# Altium PCB InfinityX PCB_1.PcbDoc
Units mm, origin at the board's own origin, x right, y up, seen from the top; angles counter-clockwise.
Board outline 76.22 x 46.5 mm, 6 copper layers (Top Layer, Layer 3, Layer 1, Layer 2, Layer 4, Bottom Layer), stack 1.019 mm thick; 25 components, 42 nets, 165 pads, 62 vias.
Unrouted connection lines stored in the file: 28.
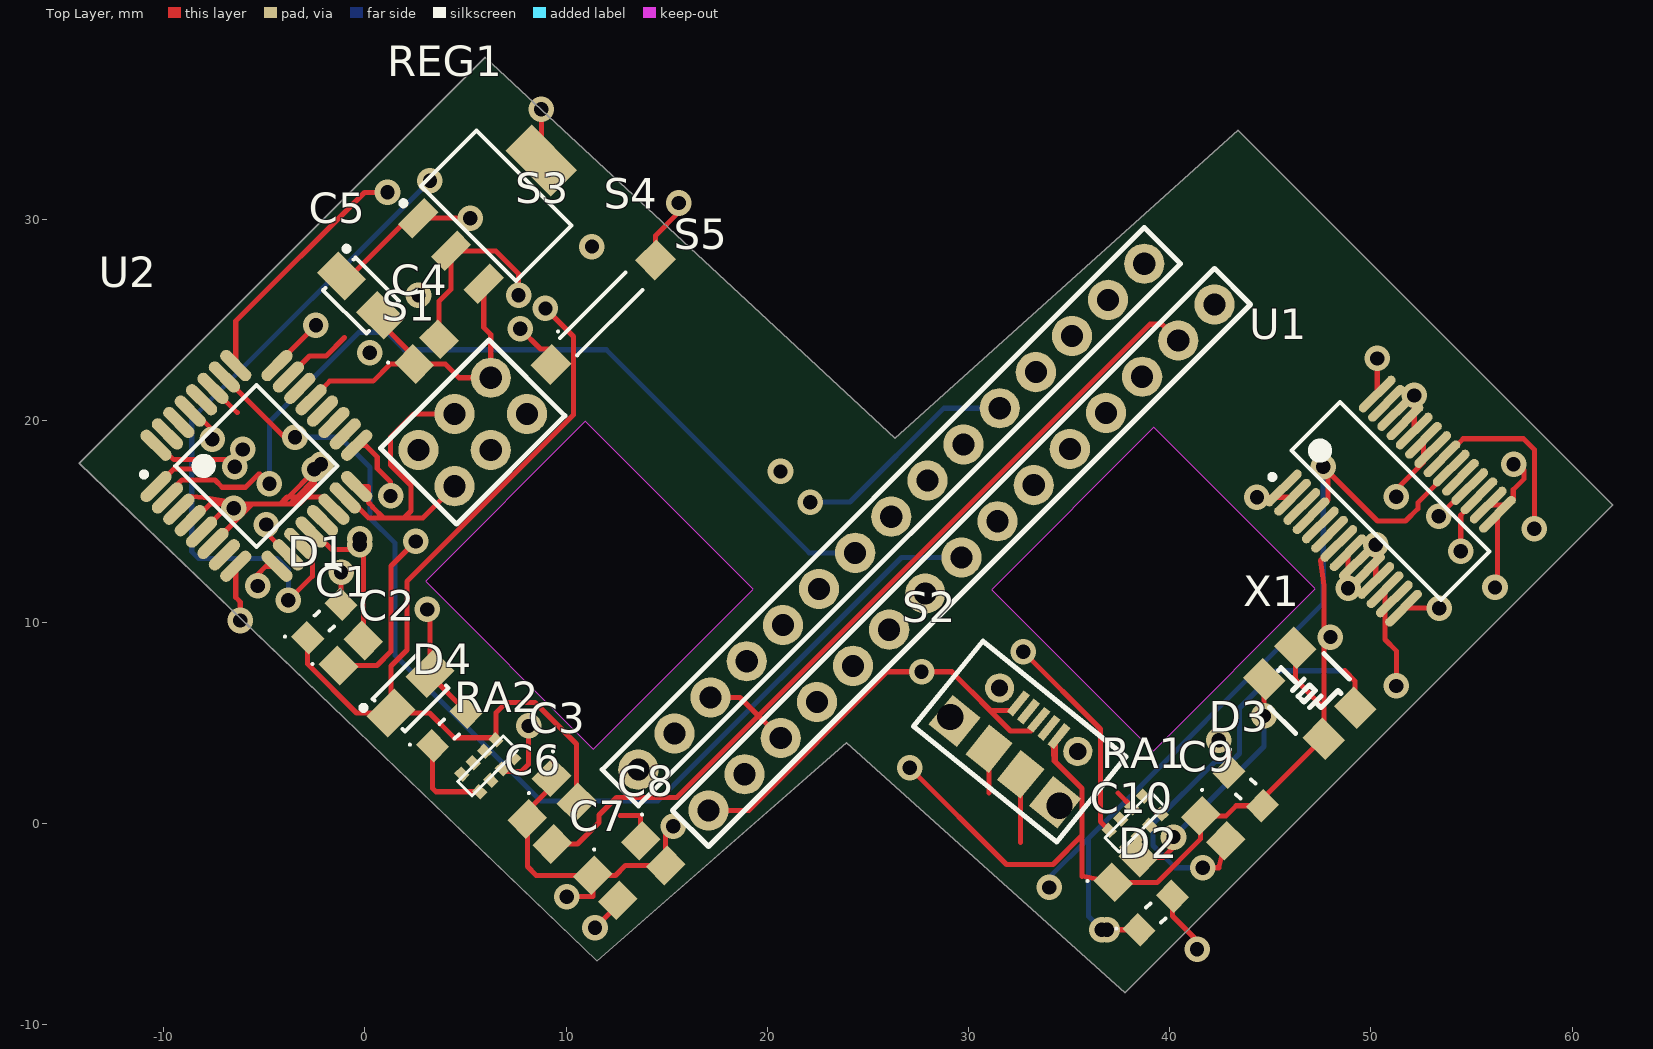
[diagram p0: Top Layer view]
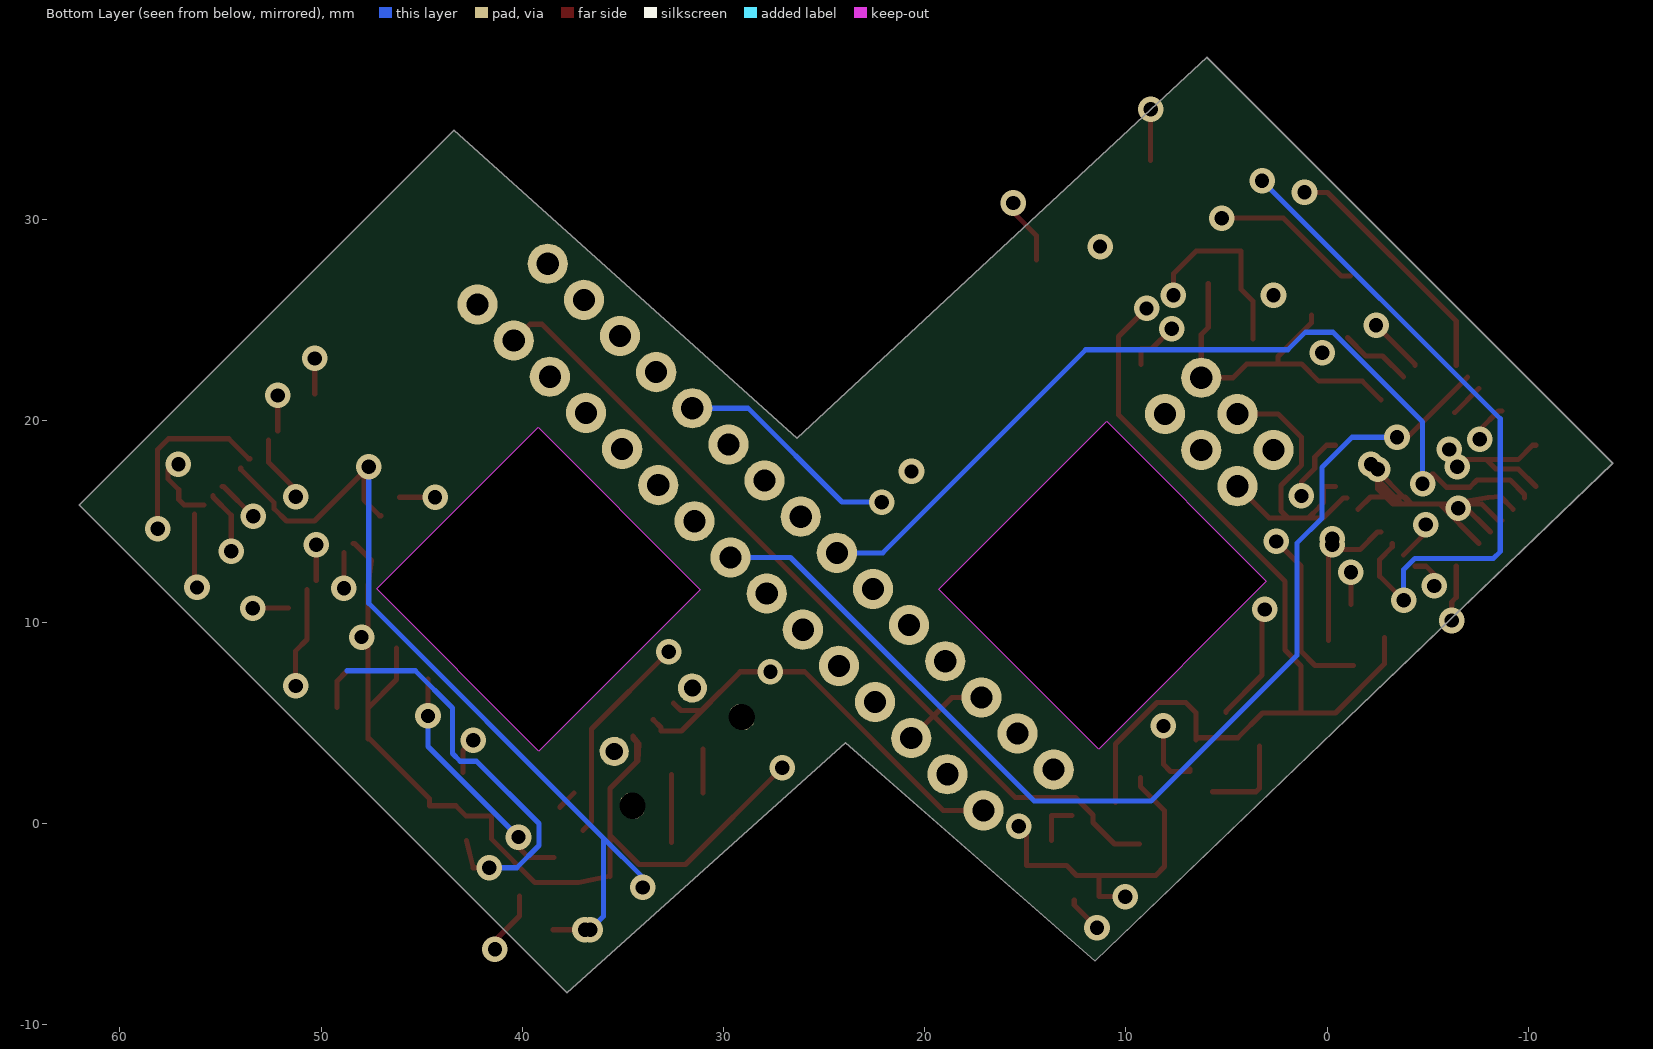
[diagram p1: Bottom Layer view, seen from below]
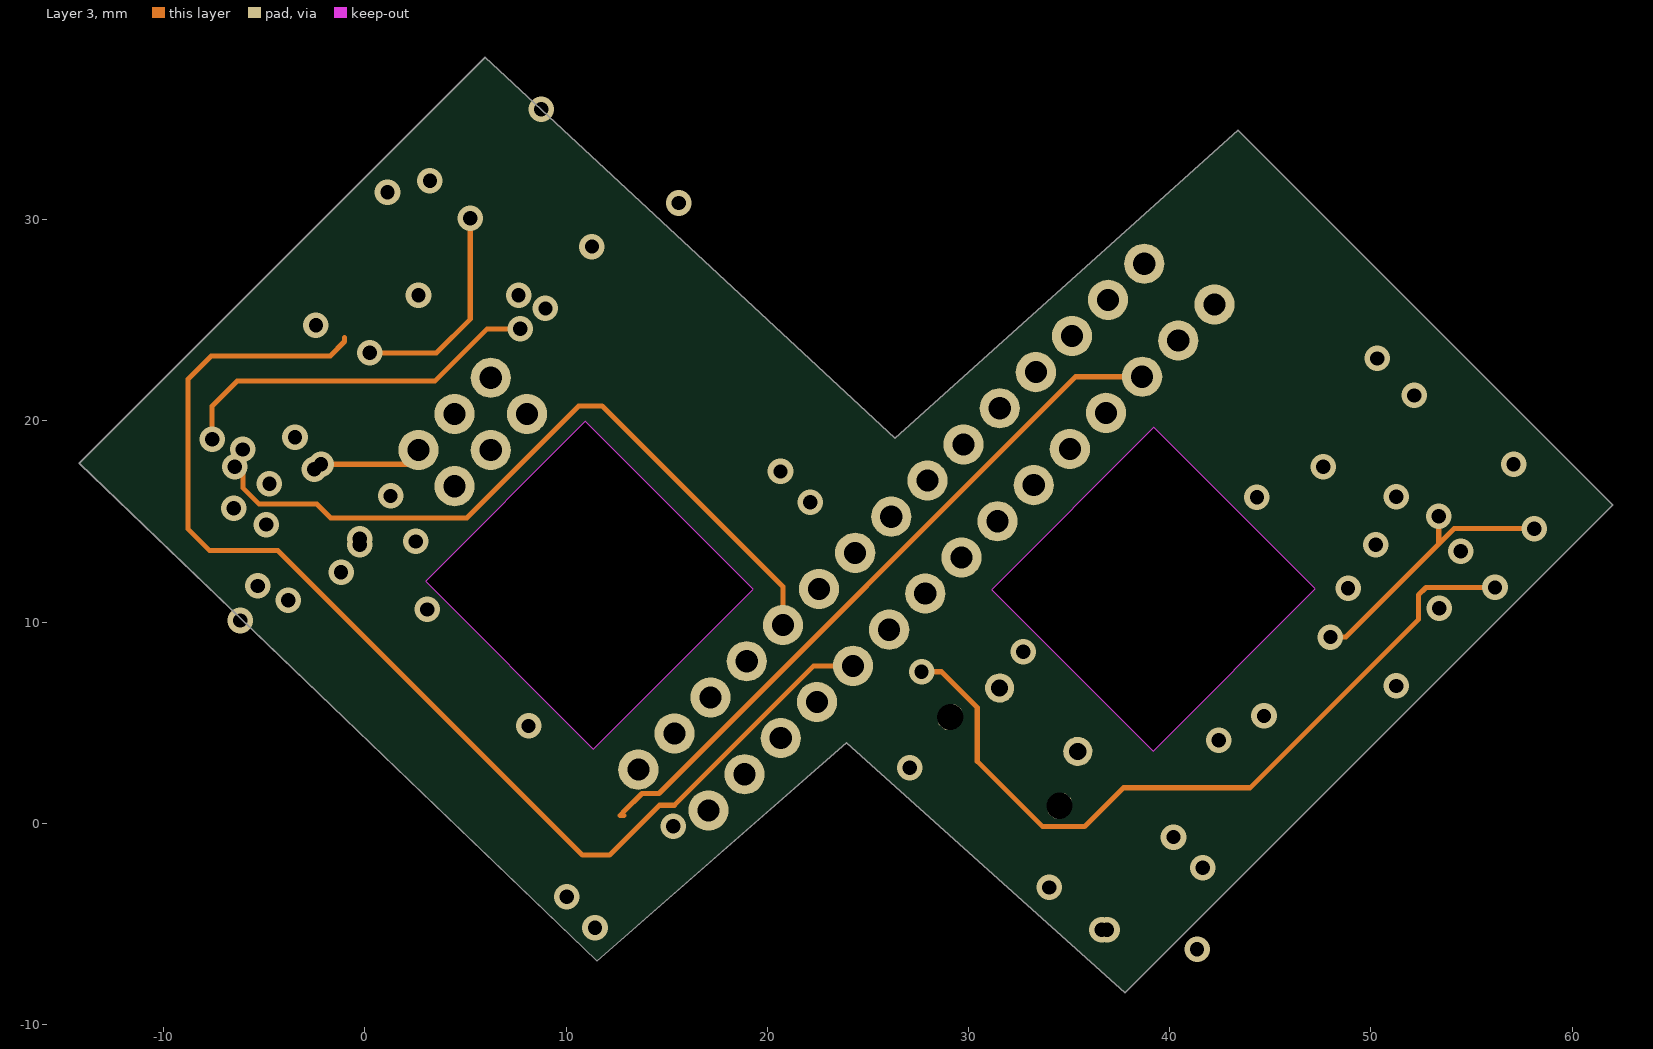
[diagram p2: Layer 3]
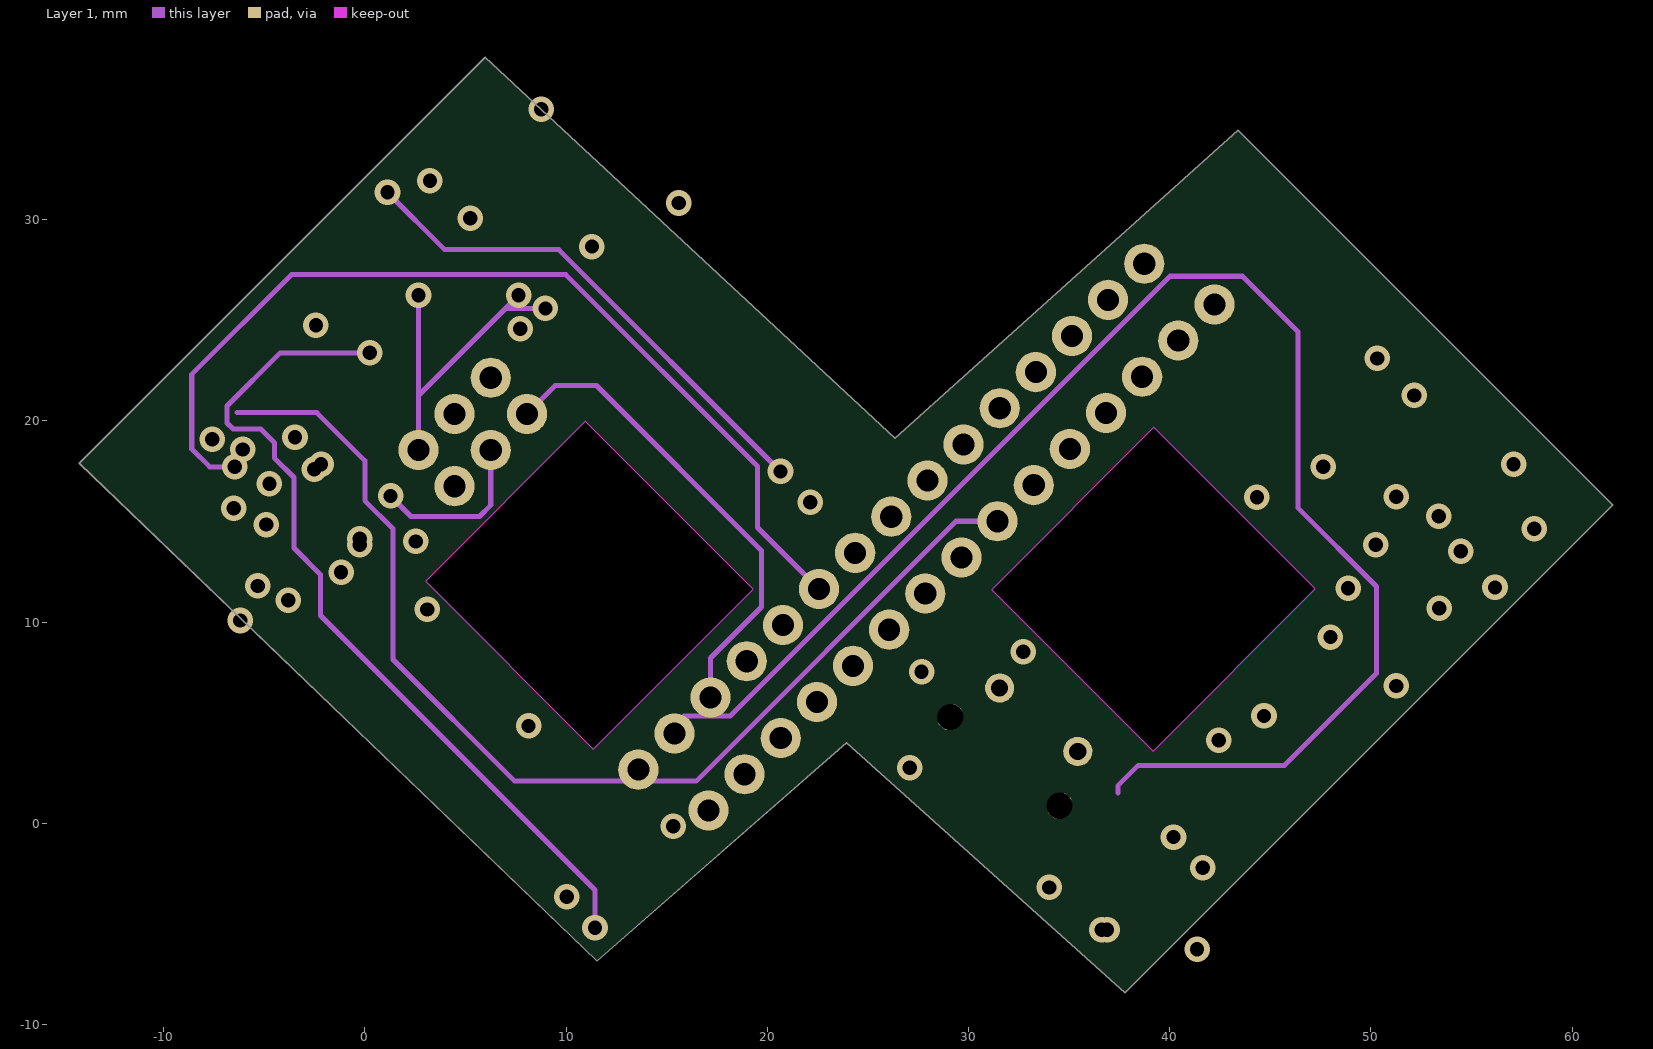
[diagram p3: Layer 1]
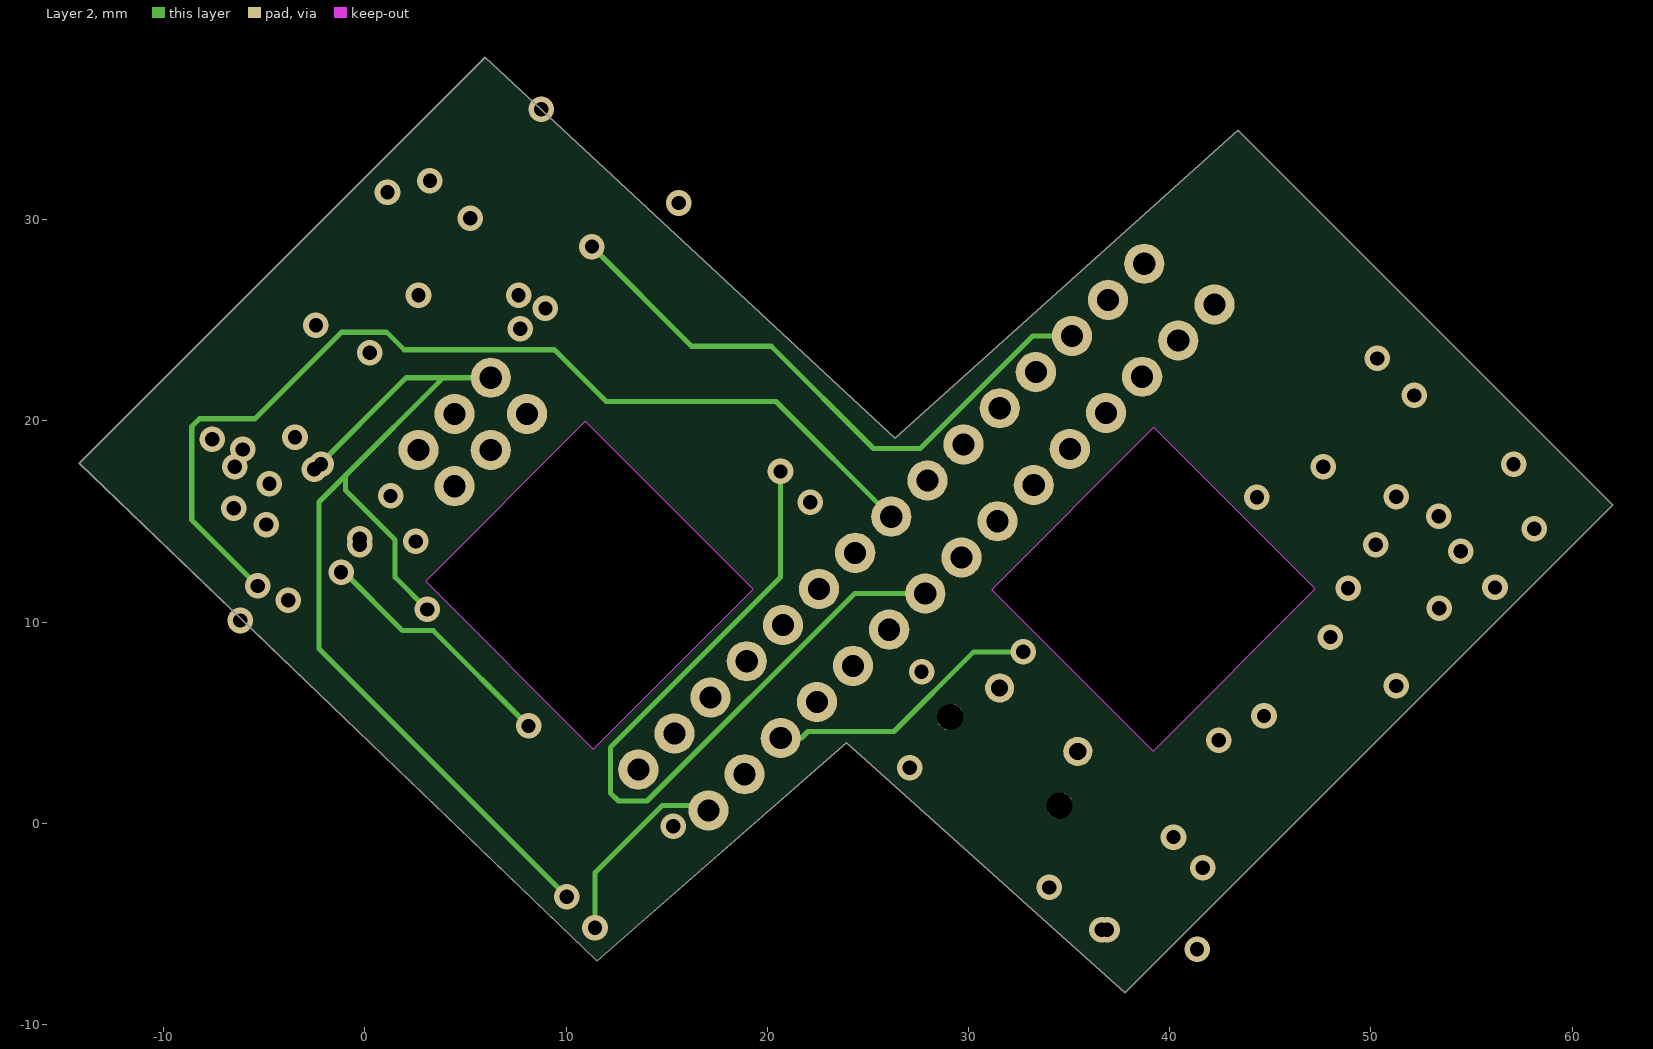
[diagram p4: Layer 2]
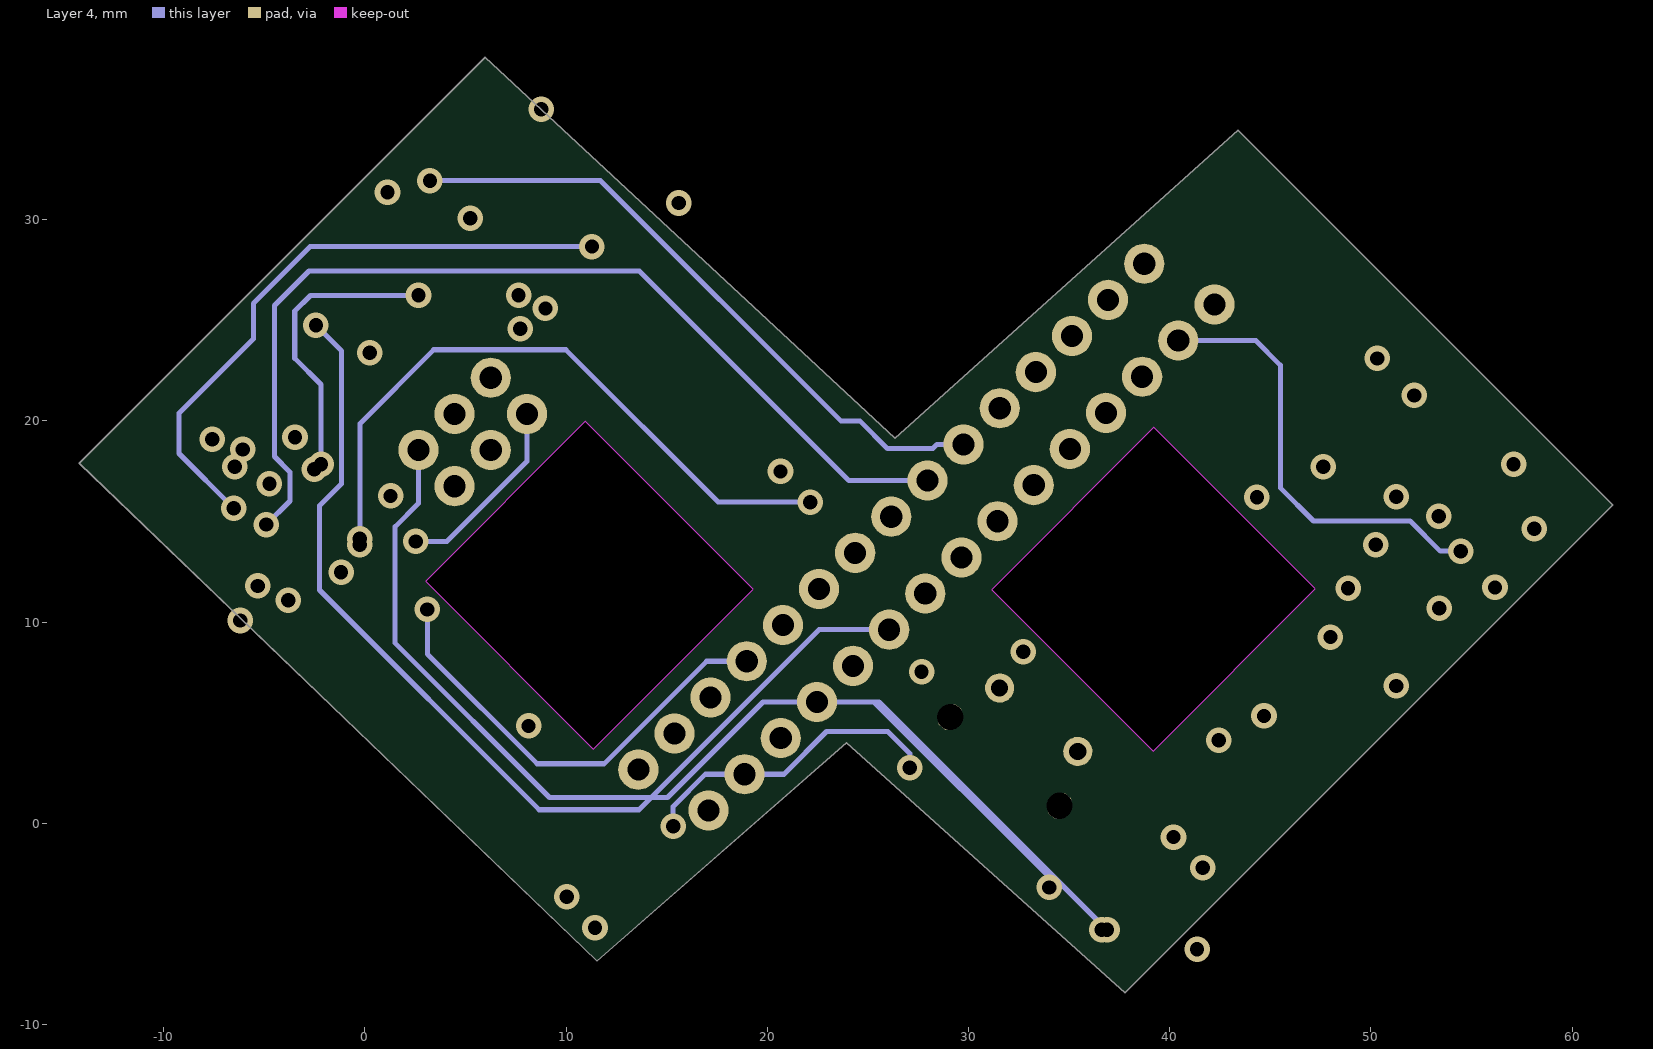
[diagram p5: Layer 4]

## Layer stack, top to bottom
Top Solder: solder mask 0.0102, Solder Resist, Dk 3.5
Top Layer: signal copper 0.0356
Dielectric 4: core 0.1016, Core-009, Dk 4.5
Dielectric 2: prepreg 0.0711, PP-006, Dk 4.1
Layer 3: signal copper 0.035
Dielectric 6: prepreg 0.0711, PP-006, Dk 4.1
Layer 1: signal copper 0.035
Dielectric 1: dielectric 0.32, FR-4, Dk 4.8
Layer 2: signal copper 0.035
Dielectric 7: prepreg 0.0711, PP-006, Dk 4.1
Layer 4: signal copper 0.035
Dielectric 3: prepreg 0.0711, PP-006, Dk 4.1
Dielectric 5: core 0.1016, Core-009, Dk 4.5
Bottom Layer: signal copper 0.0356
Bottom Solder: solder mask 0.0102, Solder Resist, Dk 3.5

## Board outline
11.543,-6.843 23.94,4.004 37.779,-8.426 62.023,15.817 43.401,34.439 26.351,19.137 5.981,38.071 -14.193,17.897
cut-out: 31.155,11.615 39.185,3.585 47.245,11.645 39.215,19.675
cut-out: 3.018,12.028 11.363,3.683 19.308,11.628 10.963,19.973

## Design rules (kind name [scope] priority, off if disabled: settings)
Clearance [All] p1: gap=0.254 ignorepadtopadclearanceinfootprint=FALSE except(0: Arc-Hole Track-Hole SMDPad-Hole THPad-Hole Via-Hole Fill-Hole Poly-Hole Region-Hole Text-Hole)
PolygonConnect [All] p1: connectstyle=Relief reliefconductorwidth=0.254 reliefentries=4 polygonreliefangle="90 Angle" airgapwidth=0.254
RoutingVias [All] p1: holewidth=0.711 width=1.27 viastyle="Through Hole" minholewidth=0.711 minwidth=1.27 maxholewidth=0.711 maxwidth=1.27
SolderMaskExpansion [All] p1: expansion=0.102 istentingtop=FALSE
Width [All] p1: maxlimit=0.254 minlimit=0.254 preferedwidth=0.254
30 further rules are at their usual default settings.

## Components (designator, comment, footprint, x,y, rotation, side; value= is the part's Value field where it differs from the comment)
C1 "100nF Ceramic Multilayer Capacitor_1" CAPCP2012X09N -0.689,8.461 r45 top
C2 "Capacitor SMT Tantalum" "CASE A - 3216X18" 2.269,6.456 r45 top value=4.7µF
C3 "100nF Ceramic Multilayer Capacitor_1" CAPCP2012X09N 9.9,1.66 r315 top
C4 "C0805C180J5GACTU" CAPCP2012X09N 3.07,23.44 r45 top
C5 "Capacitor SMT Tantalum" "CASE A - 3216X18" -0.19,26.22 r315 top value=4.7µF
C6 "100nF Ceramic Multilayer Capacitor_1" CAPCP2012X09N 8.7,-0.41 r315 top
C7 "100nF Ceramic Multilayer Capacitor_1" CAPCP2012X09N 11.95,-3.21 r315 top
C8 "100nF Ceramic Multilayer Capacitor_1" CAPCP2012X09N 14.33,-1.48 r315 top
C9 "C0805C180J5GACTU" CAPCP2012X09N 42.16,-0.25 r315 top
C10 "C0805C180J5GACTU" CAPCP2012X09N 37.82,-2.32 r45 top
D1 "Kingbright Green LED, 70 mcd 120 ° 0805" LED1913X12NGREEN -2.01,10.05 r45 top
D2 "Kingbright Red LED, 100 mcd 120 ° 0805" LED1913X12NRED 39.31,-4.46 r45 top
D3 "Kingbright Blue LED, 60 mcd 120 ° 0805" LED1913X12NBLUE 43.78,1.7 r315 top
D4 "Kingbright Orange LED, 200 mcd 120 ° 0805" LED1913X12NYEL/ORANGE 4.2,4.68 r45 top
RA1 "1k +- 5% SMT Resistor Array" "1206 RA" 37.084,-0.445 r45 top
RA2 "1k +- 5% SMT Resistor Array" "1206 RA" 4.912,2.355 r45 top
REG1 "LM1117MP-5.0/NOPB, Low Dropout Voltage Regulator, 1.5A, 5 V ±1%, 4-Pin SOT-223" SOT230P700X180-4N 6.53,30.69 r45 top
S1 "Programming Headers Dual Row" "ISP HEADER" -17.987,14.237 r45 top
S2 "NewMolex Right Angle SMT Female Type B Micro USB Connector, 30 V ac, 1.8A" MicroUSB 32.536,5.918 r321 top
S3 "Button Tactile Switch, NO 0.05 A 0.8mm" Button8014X17N 11.76,25.31 r45 top
S4 "connector;str header;single row;.1 cont centers;.095 tail;gold or gtx;36 contact" Header 13.593,2.663 r45 top
S5 "connector;str header;single row;.1 cont centers;.095 tail;gold or gtx;36 contact" Header 17.079,0.639 r45 top
U1 "FT232RL, Universal Asynchronous Receiver & Transmitter 3MBd, 28-Pin, SSOP" SOP65P780X200-28N 50.97,16.01 r45 top
U2 "ATmega328P-AU" 32A_M -5.39,17.76 r45 top
X1 "Aker 16MHz Crystal SMT" "Aker S5C Crystal" 49.218,5.746 r315 top value=16MHz

## Footprints (in the part's own frame and the unit in brackets; to place one, negate y for a bottom-side part, rotate by r counter-clockwise, add the part's x,y. Pads: shape width x height; smd on the part's side, far side on the other; paste and mask are expansions set on the pad)
32A_M [mm] "Thin QFP, 32-Leads, Body 7x7mm, Pitch 0.8mm, IPC Low Density"
  oval 1.95x0.6 smd: 1(-4.25,2.8) 2(-4.25,2) 3(-4.25,1.2) 4(-4.25,0.4) 5(-4.25,-0.4) 6(-4.25,-1.2) 7(-4.25,-2) 8(-4.25,-2.8) 17(4.25,-2.8) 18(4.25,-2) 19(4.25,-1.2) 20(4.25,-0.4) 21(4.25,0.4) 22(4.25,1.2) 23(4.25,2) 24(4.25,2.8)
  oval 0.6x1.95 smd: 9(-2.8,-4.25) 10(-2,-4.25) 11(-1.2,-4.25) 12(-0.4,-4.25) 13(0.4,-4.25) 14(1.2,-4.25) 15(2,-4.25) 16(2.8,-4.25) 25(2.8,4.25) 26(2,4.25) 27(1.2,4.25) 28(0.4,4.25) 29(-0.4,4.25) 30(-1.2,4.25) 31(-2,4.25) 32(-2.8,4.25)
  silkscreen extent -4.37,-2.85 2.85,3.77, body extent -3.5,-3.5 3.5,3.5, height 1.2
"1206 RA" [mm]
  rect 0.5x0.6 smd: 1(0,0.127) 2(0.8,0.127) 3(1.6,0.127) 4(2.4,0.127) 5(0,-1.118) 6(0.8,-1.118) 7(1.6,-1.118) 8(2.4,-1.118)
  silkscreen extent -0.41,-0.99 2.79,0.01, body extent -0.41,-1.31 2.79,0.29, height 0.5
"Aker S5C Crystal" [mm]
  rect 1.6x1.4 smd: 1(0,0) 2(-4.2,0) 3(0,-2.2) 4(-4.2,-2.2)
  round 0.254 on Top Overlay: 5(-3,-2.4)
  silkscreen extent -4,-3 -1,0.8, body extent -4.7,-2.8 0.5,0.6, height 1
Button8014X17N [mm] "Chip Inductor, 2-Leads, Body 8.00x1.40mm, IPC Medium Density"
  rect 1.5x1.4 smd: 1(-3.556,0) 2(3.81,0)
  silkscreen extent -2.3,-0.6 2.3,0.96, body extent -3.79,-1.92 4.21,1.78, height 2.5
CAPCP2012X09N [mm] "Chip Capacitor, 2-Leads, Body 2.00x1.25mm, IPC Medium Density"
  rect 1.3x1.5 smd: 1(-0.875,0) 2(0.875,0)
  silkscreen extent -1.79,0.91 -1.69,1.01, body extent -1.05,-0.57 0.95,0.68, height 0.78
"CASE A - 3216X18" [mm] "Molded Capacitor, 2-Leads, Body 3.2x1.6mm, IPC Medium Density"
  rect 1.95x1.5 smd: 1(-1.375,0) 2(1.375,0)
  silkscreen extent -2.28,-1.14 1.52,1.27, body extent -1.52,-0.76 1.65,0.84, height 1.77
Header [mm] "SIL Header"
  round 2 hole 1.1: 1(0,0) 2(2.54,0) 3(5.08,0) 4(7.62,0) 5(10.16,0) 6(12.7,0) 7(15.24,0) 8(17.78,0) 9(20.32,0) 10(22.86,0) 11(25.4,0) 12(27.94,0) 13(30.48,0) 14(33.02,0) 15(35.56,0)
  silkscreen extent -1.27,-1.27 36.83,1.27, body extent -1.33,-1.35 36.93,1.35, height 8.6
"ISP HEADER" [mm] "SIL Header for programming"
  round 2 hole 1.1: 1(17.653,-14.097) 2(17.653,-11.557) 3(20.193,-14.097) 4(20.193,-11.557) 5(22.733,-14.097) 6(22.733,-11.557)
  silkscreen extent 16.38,-15.49 24,-10.16, body extent 16.38,-15.37 24,-10.29, height 8
LED1913X12NBLUE [mm] "LED 2-Leads, Body 1.90x1.32mm, IPC Medium Density"
  rect 1.1x1.25 smd: 1(-1.175,0) 2(1.175,0)
  silkscreen extent -1.99,-0.53 0.15,0.89, body extent -1,-0.62 1.02,0.62, height 1.1
LED1913X12NGREEN [mm] "LED 2-Leads, Body 1.90x1.32mm, IPC Medium Density"
  rect 1.1x1.25 smd: 1(-1.175,0) 2(1.175,0)
  silkscreen extent -1.99,-0.53 0.15,0.89, body extent -1.01,-0.62 1.01,0.63, height 1.1
LED1913X12NRED [mm] "LED 2-Leads, Body 1.90x1.32mm, IPC Medium Density"
  rect 1.1x1.25 smd: 1(-1.175,0) 2(1.175,0)
  silkscreen extent -1.99,-0.53 0.15,0.89, body extent -1.02,-0.43 1.04,0.47, height 0.85
LED1913X12NYEL/ORANGE [mm] "LED 2-Leads, Body 1.90x1.32mm, IPC Medium Density"
  rect 1.1x1.25 smd: 1(-1.175,0) 2(1.175,0)
  silkscreen extent -1.99,-0.53 0.15,0.89, body extent -1.01,-0.62 1.01,0.63, height 1.1
MicroUSB [mm] "MicroUSB  Molex 5Pin"
  rect 0.4x1.35 smd: 1(-0.07,0) 2(0.58,0) 3(1.23,0) 4(1.88,0) 5(2.53,0)
  rrect50% 0.6x1.3 hole 1.3: ""(-2.27,-2.667) ""(-2.27,-2.667) ""(4.73,-2.667)
  rect 1.8x1.9 smd: ""(-1.98,-2.678) ""(4.45,-2.678)
  round 1.45 hole 0.85: ""(-1.27,0) ""(3.73,0)
  rect 1.5x1.9 smd: ""(0.218,-2.678) ""(2.242,-2.678)
  silkscreen extent -3.39,-4.17 5.75,1.3, body extent -2.83,-5.32 5.37,0.11, height 2.68
SOP65P780X200-28N [mm] "SOP, 28-Leads, Body 10.20x5.30mm, Pitch 0.65mm, IPC Medium Density"
  oval 2.4x0.45 smd: 1(-3.3,4.225) 2(-3.3,3.575) 3(-3.3,2.925) 4(-3.3,2.275) 5(-3.3,1.625) 6(-3.3,0.975) 7(-3.3,0.325) 8(-3.3,-0.325) 9(-3.3,-0.975) 10(-3.3,-1.625) 11(-3.3,-2.275) 12(-3.3,-2.925) 13(-3.3,-3.575) 14(-3.3,-4.225) 15(3.3,-4.225) 16(3.3,-3.575) 17(3.3,-2.925) 18(3.3,-2.275) 19(3.3,-1.625) 20(3.3,-0.975) 21(3.3,-0.325) 22(3.3,0.325) 23(3.3,0.975) 24(3.3,1.625) 25(3.3,2.275) 26(3.3,2.925) 27(3.3,3.575) 28(3.3,4.225)
  silkscreen extent -3.42,-5.25 1.7,5.25, body extent -3.91,-5.1 3.91,5.1, height 2
SOT230P700X180-4N [mm] "SOT223, 4-Leads, Body 6.50x7.00mm (avg), Pitch 2.30mm, IPC Medium Density"
  rect 1.85x1 smd: 1(-3.175,2.3) 2(-3.175,0) 3(-3.175,-2.3)
  rect 1.85x3.2 smd: 4(3.175,0)
  silkscreen extent -3.3,-3.35 1.95,3.47, body extent -3.8,-3.12 3.29,3.38, height 1.65

## Part data
C1 C3 C6 C7 C8: "AVX 0805 Standard 100nF Ceramic Multilayer Capacitor, 50 V dc X7R Dielectric ±10% SMD", Capacitance=100nF, Manufacturer=AVX, Package=0805, Voltage=50V, Creator="Ritesh Kanjee", Datasheet URL=http://za.rs-online.com/web/p/ceramic-multilayer-capacitors/4646688/, Date Created="18 February 2015", RS Stock No.=464-6688
C2 C5: library part "4.7µF Tant RS 496-3545", "Capacitor,tantalum,SMT,16V,4.7uF,10%,A-case", Package=3216-18, Tolerance=10%, Voltage=16V, ComponentLink1Description="Supplier Website", ComponentLink1URL=http://za.rs-online.com/web/search/searchBrowseAction.html?method=getProduct&R=4963545, ComponentLink2Description="RS Data sheet", ComponentLink2URL=http://docs-europe.origin.electrocomponents.com/webdocs/04ed/0900766b804ed4cc.pdf, LatestRevisionDate=28-April-2010, Part Originator="H Theron", Publisher=DPSS, RS Stock Nr.=496-3545
C4 C9 C10: library part "18pF Ceramic Multilayer Capacitor, 50 V dc C0G Dielectric ±5% SMD", "18pF Ceramic Multilayer Capacitor, 50 V dc C0G Dielectric ±5% SMD", Capacitance=18pF, Manufacturer=Kemet, Package=0805, Voltage=50V, Creator="Ritesh Kanjee", Datasheet URL=http://za.rs-online.com/web/p/ceramic-multilayer-capacitors/6480935/?searchTerm=C0805C180J5GACTU&relevancy-data=636F3D3226696E3D4931384E4B6E6F776E41734D504E266C753D656E266D6D3D6D61746368616C6C7061727469616C26706D3D5E5B5C707B4C7D5C707B4E647D2D2C2F255C2E5D2B2426706F3D313326736E3D592673743D4D414E5F504152545F4E554D4245522677633D424F5448267573743D4330383035433138304A35474143545526, Date Created="18 February 2015", RS Stock No.=648-0935
D1: Color=Green, Forward Voltage="2.1 V", Manufacturer=KingBright, Manufacturer Part No.=KP-2012MGC, Creator="Ritesh Kanjee", Datasheet URL=http://za.rs-online.com/web/p/visible-leds/4663778/, Date Created="18 February 2015", RS Stock No.=466-3778
D2: Color=RED, Forward Voltage=1.85V, Manufacturer=KingBright, Manufacturer Part No.=KP-2012SRC-PRV, Creator="Ritesh Kanjee", Datasheet URL=http://za.rs-online.com/web/p/visible-leds/4663813/, Date Created="18 February 2015", RS Stock No.=466-3813
D3: Color=Blue, Forward Voltage=3.2V, Manufacturer=KingBright, Manufacturer Part No.=KP-2012PBC-A, Creator="Ritesh Kanjee", Datasheet URL=http://za.rs-online.com/web/p/visible-leds/4663784/, Date Created="18 February 2015", RS Stock No.=466-3784
D4: Color=Orange, Forward Voltage=1.85V, Manufacturer=KingBright, Manufacturer Part No.=KP-2012SEC, Creator="Ritesh Kanjee", Datasheet URL=http://za.rs-online.com/web/p/visible-leds/4663790/, Date Created="18 February 2015", RS Stock No.=466-3790
RA1 RA2: "1k +- 5% SMT Resistor Array 4 Res", Manufacturer=Bourns, Manufacturer Part No.=CAY16-102J4LF, Creator="R Kanjee", Date Created="25 February 2015", RS Stock No.=552-5579, Wattage=0.25W
REG1: library part LM1117MP-5.0, Manufacturer="Texas Instruments", Maximum Input Voltage=15V, Output Voltage=5V, Supply Current=1.5Amps, Created By="R Kanjee", Datasheet URL=http://za.rs-online.com/web/p/low-dropout-voltage-regulators/5339583/, Date Created="26 February 2015", RS Stock No.=533-9583
S1: library part "Programming ISP, Programming Headers Dual Row", Current Rating="3Amps Continuous", Manufacturer=FCI, Manufacturer Part No.=68000-236HLF, Created By="R Kanjee", Date Created="1 March 2015", RS Stock No.=2509565626
S2: library part "Micro USB Connector, 30 V ac, 1.8A", Manufacturer=Molex, Manufacturer Part No.=105017-0001, Max Current=1.8A, Max Voltage=30V, Creator="R Kanjee", Datasheet URL=http://za.rs-online.com/web/p/micro-usb-connectors/8486764/, Date Created="28 February 2015", RS Stock No=848-6764
S3: Manufacturer="C & K", Manufacturer Part No.=B3F1000, Creator="R Kanjee", Date Created="25 February 2015", RS Stock No.=516-255, State="Normaly Open"
S4 S5: library part "Single row; PCB headers", Current Rating="3Amps Continuous", Manufacturer=FCI, Manufacturer Part No.=68000-236HLF, Created By="R Kanjee", Date Created="1 March 2015", RS Stock No.=2509565626
U1: library part "FT232RL USB to UART, Universal Asynchronous Receiver & Transmitter 3MBd, 28-Pin, SSOP", Manufacturer="FTDI Chip", Manufacturer Part No.=FT232RL, Creator="R Kanjee", Date Created="03 March 2015", Pin Count=28, RS Stock No.=406-580
U2: library part CMP-0095-00269-2, "8-bit AVR Microcontroller, 32KB Flash, 1KB EEPROM, 2KB SRAM, 32-pin TQFP, Industrial Grade (-40°C to 85°C)", Code_JEDEC=MS-026-ABA, ComponentLink1Description="Manufacturer URL", ComponentLink1URL=http://www.atmel.com/, ComponentLink2Description="ATmega48A/48PA/88A/88PA/168A/168PA/328/328P Datasheet", ComponentLink2URL=http://www.atmel.com/dyn/resources/prod_documents/doc8271.pdf, ComponentLink3Description="ATmega48A/48PA/88A/88PA/168A/168PA/328/328P Summary", ComponentLink3URL=http://www.atmel.com/dyn/resources/prod_documents/8271S.pdf, DatasheetVersion="revD, May-2011", PackageDescription="32-Lead, 7x7x1.0 mm Body, 0.8mm Lead Pitch, Thin Profile Plastic Quad Flat Package (TQFP)", PackageReference=32A, PackageVersion="revC, Oct-2010", RevisionNote="DatasheetVersion & PackageVersion updated. URLs added."
X1: library part "Aker  C5S-16.000-12-3030-X", "Aker S5C SMT Crystal", Frequency Stability=+/-30ppm, Load Capacitance=12pF, Manufacturer=Aker, Manufacturer Part #=C5S-16.000-12-3030-X, Package="3.2x5mm SMD", Creator="R Kanjee", HelpURL=http://za.rs-online.com/web/p/crystal-units/6719488/, RS="RS 671-9488", RS Stock Nr.=671-9488, Supplier=RS

## Via types
v1: diameter 1.27, hole 0.711, Top Layer to Bottom Layer, 62 vias

## Nets (pads, with @x,y where several pads share a name; then routed paths per layer and width w, separated by ;. In a path a pad name is that pad's centre, name@x,y a point inside that pad or via, vN(x,y) a via of type N, cw(c..) or ccw(c..) an arc to the next point about the centre after c; other vN are vias at no path point)
3V3: C6.2 S5.14 U1.17 | length 67.4
  Top Layer w0.254: C6.2 10.576,-1.029 11.643,0.038 11.643,0.416 12.506,1.28 15.504,1.28 39.024,24.8 39.616,24.8 S5.14 ; v1(54.467,13.522) 54.467,15.308 55.372,16.213 U1.17
  Layer 4 w0.254: S5.14 44.281,23.988 45.501,22.768 45.501,16.672 47.152,15.021 51.953,15.021 53.451,13.522 v1(54.467,13.522)
A0: S5.5 U2.23 | length 63.5
  Top Layer w0.254: U2.23 -2.753,23.225 -1.921,23.225 -1.006,24.14
  Layer 3 w0.254: -1.006,24.14 -1.006,23.936 -1.718,23.225 -7.636,23.225 -8.779,22.082 -8.779,14.615 -7.712,13.548 -4.308,13.548 10.824,-1.584 12.16,-1.584 14.64,0.895 15.382,0.895 22.311,7.824 S5.5
A1: S5.6 U2.24 | length 53.5
  Top Layer w0.254: U2.24 -4.365,22.813 v1(-2.429,24.749)
  Layer 4 w0.254: v1(-2.429,24.749) -1.159,23.479 -1.159,16.875 -2.251,15.783 -2.251,11.592 8.671,0.67 13.624,0.67 22.574,9.62 S5.6
A2: S5.7 U2.25 | length 77.3
  Top Layer w0.254: U2.25 -6.415,24.956 -0.018,31.353 v1(1.127,31.353)
  Layer 1 w0.254: v1(1.127,31.353) 3.972,28.508 9.636,28.508 v1(20.66,17.485)
  Layer 2 w0.254: v1(20.66,17.485) 20.66,12.227 12.202,3.769 12.202,1.508 12.608,1.102 14.03,1.102 24.344,11.416 S5.7
A3: S5.8 U2.26 | length 55.1
  Top Layer w0.254: U2.26 -3.988,19.187 v1(-3.47,19.187)
  Bottom Layer w0.254: v1(-3.47,19.187) -1.235,19.187 0.264,17.688 0.264,15.163 1.508,13.918 1.508,8.341 8.747,1.102 14.564,1.102 26.674,13.212 S5.8
A4: S5.9 U2.27 | length 57.4
  Top Layer w0.254: U2.27 -6.34,20.407
  Layer 1 w0.254: -6.34,20.407 -2.388,20.407 0.003,18.016 0.003,16.033 1.4,14.636 1.4,8.145 7.452,2.092 16.469,2.092 29.384,15.008 S5.9
A5: S5.10 U2.28
A6: S5.11 U2.19
A7: S5.12 U2.22
AREF: C8.1 S5.13 U2.20 | length 37.4
  Top Layer w0.254: 12.695,0.383 13.711,0.383 C8.1
  Layer 3 w0.254: 12.887,0.391 12.695,0.383 12.887,0.594 13.776,1.483 14.615,1.483 35.324,22.192 S5.13
D0/RX: RA1.3 S4.2 U2.30 | length 75.8
  Top Layer w0.254: 37.424,1.513 38.126,0.811 RA1.3
  Layer 1 w0.254: S4.2@15.872,5.332 18.159,5.332 40.015,27.188 43.621,27.188 46.37,24.439 46.37,15.676 50.276,11.77 50.276,7.452 45.704,2.88 38.44,2.88 37.424,1.864 37.424,1.513
D1/TX: RA1.2 S4.1 U2.31
D2: S4.5 U2.32 | length 42.4
  Top Layer w0.254: U2.32 -10.207,18.785 -9.491,18.069 -6.061,18.069 v1(-6.061,18.577)
  Layer 3 w0.254: v1(-6.061,18.577) -6.061,16.672 -5.248,15.859 -2.378,15.859 -1.692,15.173 5.064,15.173 10.627,20.736 11.795,20.736 20.778,11.754 S4.5
D3: S4.6 U2.1 | length 52.3
  Top Layer w0.254: U2.1 -9.498,17.612 -8.372,17.612 -7.915,18.069 -6.823,18.069 v1(-6.467,17.713)
  Layer 1 w0.254: v1(-6.467,17.713) -7.712,17.713 -8.601,18.602 -8.601,22.311 -3.648,27.264 9.992,27.264 19.517,17.739 19.517,14.701 S4.6
D4: S4.7 U2.2 | length 44.7
  Top Layer w0.254: U2.2 -9.809,16.337 -9.094,17.053 -7.441,17.053 -7.085,16.697 -5.934,16.697 -5.281,17.35 -5.215,17.35 v1(-4.74,16.875)
  Bottom Layer w0.254: v1(-4.74,16.875) -4.74,19.949 -0.284,24.405 1.086,24.405 1.961,23.53 11.998,23.53 22.089,13.44 S4.7
D5: S4.8 U2.9 | length 51.5
  Top Layer w0.254: v1(-5.324,11.795) -5.324,12.369 -4.918,12.775 U2.9
  Layer 2 w0.254: v1(-5.324,11.795) -8.601,15.072 -8.601,19.72 -8.22,20.101 -5.463,20.101 -1.159,24.405 1.086,24.405 1.961,23.53 9.433,23.53 11.998,20.965 20.437,20.965 S4.8
D6: S4.9 U2.10 | length 51.1
  Top Layer w0.254: v1(-4.893,14.843) -4.893,14.434 U2.10
  Layer 4 w0.254: v1(-4.893,14.843) -3.714,16.022 -3.714,17.449 -4.486,18.221 -4.486,25.727 -2.771,27.442 13.645,27.442 24.055,17.032 S4.9
D7: S4.10 U2.11 | length 65.7
  Top Layer w0.254: v1(-3.8,11.084) -2.607,12.278 -2.607,13.111 -3.233,13.738 U2.11
  Layer 4 w0.254: v1(3.235,31.937) 11.719,31.937 23.657,19.999 24.597,19.999 25.968,18.628 28.229,18.628 28.429,18.828 S4.10
  Bottom Layer w0.254: v1(-3.8,11.084) -3.8,12.608 -4.359,13.167 -8.271,13.167 -8.601,13.497 -8.601,20.101 v1(3.235,31.937)
D8: S4.11 U2.12 | length 47.1
  Top Layer w0.254: U2.12 -2.499,14.472 -1.625,13.597 -0.779,13.597 v1(-0.244,14.132)
  Layer 4 w0.254: v1(-0.244,14.132) -0.244,19.86 3.426,23.53 9.992,23.53 17.561,15.961 v1(22.133,15.961)
  Bottom Layer w0.254: v1(22.133,15.961) 24.114,15.961 28.777,20.624 S4.11
D9: S4.12 U2.13
D10: S4.13 U2.14 | length 66.6
  Top Layer w0.254: v1(-6.518,15.656) -6.315,15.859 -4.232,15.859 -3.877,16.215 -2.148,16.215 U2.14
  Layer 2 w0.254: v1(11.287,28.661) 16.24,23.708 20.203,23.708 25.283,18.628 27.605,18.628 33.193,24.216 S4.13
  Layer 4 w0.254: v1(-6.518,15.656) -9.236,18.374 -9.236,20.375 -5.532,24.078 -5.532,25.839 -2.711,28.661 v1(11.287,28.661)
D11/MOSI: S1.4 S4.14 U2.15 | length 11.6
  Top Layer w0.254: U2.15 -0.802,16.169 0.198,15.168 1.94,15.168 2.296,15.524 2.296,16.78 1.28,17.796 1.28,19.187 2.437,20.344 S1.4
D12/MISO: S1.1 S4.15 U2.16 | length 6.7
  Top Layer w0.254: U2.16 0.187,16.735 0.187,15.935 0.391,15.732 0.391,15.707 0.924,15.173 2.885,15.173 S1.1
D13/SCK: RA2.1 S1.3 S5.15 U2.17 | length 11.8
  Top Layer w0.254: U2.17 0.03,18.785 0.619,18.196 0.619,17.63 1.28,16.97 v1(1.28,16.266)
  Layer 1 w0.254: v1(1.28,16.266) 2.296,15.25 5.699,15.25 6.26,15.81 S1.3
GND: C2.2 C3.1 C4.1 C5.2 C6.1 C7.1 C8.2 C9.1 C10.1 D3.2 D4.2 REG1.3 S1.6 S2.5 S4.4 S5.2 U1.7 U1.18 U1.21 U2.3 U2.5 U2.21 X1.2 X1.3 | length 220.2
  Top Layer w0.254: U2.3 -8.612,16.235 -8,16.189 -6.092,15.859 ; U2.5 -6.725,15.859 -6.092,15.859 ; U2.21 -1.746,21.97 0.416,21.97 1.267,22.821 C4.1 ; v1(-2.505,17.586) -2.505,16.824 ; C5.2 0.782,24.869 2.451,23.2 C4.1 ; v1(3.108,10.627) 3.241,10.494 C2.2 3.241,7.362 5.031,5.572 D4.2 ; REG1.3 5.911,24.641 6.26,24.292 S1.6 4.679,22.14 3.997,22.821 C4.1 ; C3.1 9.281,1.819 8.081,0.619 C6.1 8.081,-2.149 8.523,-2.591 C7.1 ; v1(10.043,-3.648) 11.331,-3.648 C7.1 ; v1(15.326,-0.143) 14.949,-0.52 C8.2 12.948,-2.099 12.456,-2.591 C7.1 ; v1(27.086,2.753) 31.887,-2.048 34.198,-2.048 35.646,-0.6 ; X1.2 46.249,7.139 47.663,5.725 ; v1(47.99,9.255) v1@47.663,8.928 ; U1.7 48.345,13.906 47.502,13.064 47.663,11.818 v1@47.663,8.928 ; v1(53.375,15.26) 54.85,16.735 U1.18 ; U1.21 53.595,18.114 54.592,19.11 57.591,19.11 58.125,18.577 v1(58.125,14.64) ; -6.092,15.859 -3.47,15.859 ; -3.47,15.859 -3.267,15.859 -2.505,16.621 -2.505,16.824 ; -3.47,15.859 -2.505,16.824 ; 35.646,-0.6 35.646,1.711 ; 35.646,-0.6 35.646,-2.632 C10.1 39.378,-2.939 41.541,-0.775 C9.1 42.809,0.369 43.309,0.869 D3.2 44.611,1.217 47.584,4.19 X1.3 47.663,5.725 ; 35.646,1.711 35.646,1.737 34.325,3.058 34.325,4.026 34.502,4.203 S2.5 34.203,3.957 34.249,3.108 35.646,1.711 ; 47.663,5.725 v1@47.663,8.928
  Layer 2 w0.254: v1(-2.505,17.586) 2.049,22.14 3.903,22.14 ; v1(3.108,10.627) 1.508,12.227 1.508,14.081 -0.956,16.545 -0.956,17.282 ; S1.6 3.903,22.14 ; v1(10.043,-3.648) -2.276,8.671 -2.276,15.961 -0.956,17.282 ; -0.956,17.282 3.903,22.14
  Layer 3 w0.254: v1(47.99,9.255) 48.752,9.255 53.375,13.878 ; v1(53.375,15.26) 53.375,13.878 ; v1(58.125,14.64) 54.137,14.64 53.375,13.878
  Layer 4 w0.254: v1(3.108,10.627) 3.108,8.417 8.569,2.956 11.897,2.956 16.992,8.052 S4.4 ; v1(15.326,-0.143) 15.326,0.839 16.922,2.436 S5.2 20.829,2.436 22.949,4.556 25.994,4.556 27.086,3.464 v1(27.086,2.753)
GREEN_TX: RA2.3 U1.22
LED_BLUE: C2.1 C3.2 C4.2 D1.1 D2.1 RA1.5 RA2.4 REG1.2 S1.2 S5.4 U1.4 U1.20 U2.4 U2.6 | length 219
  Top Layer w0.254: U2.4 -8.51,15.038 -7.688,15.859 -5.594,15.859 ; U2.6 -5.594,15.859 ; D1.1 -2.841,7.918 -0.407,5.484 C2.1 ; C4.2 3.689,25.943 4.285,26.539 REG1.2 6.512,28.445 7.642,27.315 v1(7.642,26.235) ; RA2.4 RA2.4@6.519,4.251 ; v1(8.976,25.587) 10.373,24.19 10.373,20.304 2.092,12.024 2.092,8.613 1.296,7.817 C2.1 ; C3.2 10.519,3.944 8.459,6.004 7.027,6.004 6.519,5.496 RA2.4@6.519,4.251 ; v1(36.628,-5.291) v1@36.899,-5.291 ; v1(36.89,-5.299) v1@36.899,-5.291 ; D2.1 v1@36.899,-5.291 ; U1.4 47.09,15.285 47.864,16.059 v1@47.864,17.484 ; U1.20 53.993,17.592 52.334,15.933 52.334,15.631 51.724,15.021 50.327,15.021 v1@47.864,17.484 ; -5.594,15.859 -4.156,15.859 ; -4.156,15.859 -3.724,15.859 -2.175,17.409 v1(-2.175,17.84) -4.156,15.859 ; C2.1 3.21,5.484 4.442,4.251 RA2.4@6.519,4.251 ; v1@47.864,17.484 v1(47.635,17.713) 47.864,17.713 v1@47.864,17.484
  Layer 1 w0.254: S1.2 2.668,21.261 ; v1(2.668,26.235) 2.668,21.261 ; v1(7.642,26.235) 6.995,25.587 ; v1(8.976,25.587) 6.995,25.587 ; 2.668,21.261 6.995,25.587
  Layer 3 w0.254: v1(-2.175,17.84) 2.668,17.84 S1.2
  Layer 4 w0.254: v1(-2.175,17.84) -2.175,21.803 -3.481,23.109 -3.481,25.455 -2.701,26.235 v1(2.668,26.235) ; S1.2 2.668,15.901 1.508,14.742 1.508,8.95 9.179,1.28 15.048,1.28 19.796,6.028 S5.4 25.31,6.028 ; v1(34.02,-3.191) 34.02,-2.683 25.31,6.028 ; v1(36.89,-5.299) 25.564,6.028 25.31,6.028
  Bottom Layer w0.254: v1(34.02,-3.191) 34.02,-2.683 35.976,-0.727 ; v1(36.628,-5.291) 35.976,-4.639 35.976,-0.727 ; v1(47.635,17.713) 47.635,10.932 35.976,-0.727
NetC1_2: C1.2 U1.2 | length 6.6
  Top Layer w0.254: v1(-0.244,13.847) -0.07,13.673 C1.2 ; v1(44.339,16.204) U1.2
NetC9_2: C9.2 U2.7 X1.1 | length 22.2
  Top Layer w0.254: v1(41.64,-2.209) 42.439,-2.209 C9.2 ; 48.701,7.579 48.71,7.568 49.218,7.061 X1.1
  Bottom Layer w0.254: v1(41.64,-2.209) 40.278,-2.209 39.176,-1.108 39.176,-0.016 42.275,3.083 43.088,3.083 43.469,3.464 43.469,5.725 45.323,7.579 48.701,7.579
NetC10_2: C10.2 U2.8 X1.4 | length 15
  Top Layer w0.254: U2.8 -6.415,11.227 -6.188,11 v1(-6.188,10.077) ; C10.2 39.684,-1.701 40.192,-1.193 v1(40.192,-0.685) ; v1(44.688,5.333) 44.693,5.337 X1.4
  Bottom Layer w0.254: v1(40.192,-0.685) 44.688,3.811 v1(44.688,5.333)
NetD1_2: D1.2 RA2.7 | length 17.6
  Top Layer w0.254: D1.2 v1(-1.179,12.481) ; RA2.7 6.833,2.575 7.782,2.575 8.138,2.931 v1(8.138,4.836)
  Layer 2 w0.254: v1(-1.179,12.481) -1.04,12.481 1.87,9.571 3.402,9.571 v1(8.138,4.836)
NetD2_2: D2.2 RA2.6 | length 3.1
  Top Layer w0.254: D2.2 40.141,-4.61 41.361,-5.83 v1(41.361,-6.256)
NetD3_1: D3.1 RA2.8 | length 1.8
  Top Layer w0.254: v1(42.441,4.124) 42.949,3.616 D3.1
NetD4_1: D4.1 RA2.5 | length 4.5
  Top Layer w0.254: D4.1 3.369,1.737 3.541,1.565 RA2.5
NetS2_2: S2.2 U1.16 | length 3.7
  Top Layer w0.254: U1.16 56.804,15.816 57.078,16.09 57.078,16.579 57.601,17.102 57.601,17.558 57.312,17.848 v1(57.093,17.848)
NetS2_3: S2.3 U1.15 | length 50
  Top Layer w0.254: v1(27.67,7.528) 29.143,7.528 32.09,4.582 33.106,4.582 33.106,4.758 S2.3 ; v1(56.169,11.719) 56.291,11.841 U1.15
  Layer 3 w0.254: v1(27.67,7.528) 28.661,7.528 30.439,5.75 30.439,3.083 33.69,-0.168 35.773,-0.168 37.703,1.762 44.002,1.762 52.359,10.119 52.359,11.338 52.74,11.719 v1(56.169,11.719)
NetS3_1: S3.1 U2.29 | length 23.2
  Top Layer w0.254: U2.29 -8.51,20.482 -7.585,19.558 v1(-7.585,19.085) ; v1(7.722,24.571) 8.726,23.567 9.246,23.567 S3.1
  Layer 3 w0.254: v1(-7.585,19.085) -7.585,20.736 -6.351,21.97 3.479,21.97 6.08,24.571 v1(7.722,24.571)
RED_RX: RA2.2 U1.23 | length 3.4
  Top Layer w0.254: v1(51.267,16.229) 51.267,16.591 52.614,17.939 U1.23
RESET: C1.1 RA1.1 S1.5 S4.3 S5.3 | length 71.2
  Top Layer w0.254: C1.1 0.604,7.843 1.305,8.544 1.305,12.786 v1(2.524,14.005) ; S4.3 18.648,6.256 S5.3 ; v1(32.725,8.519) 36.56,4.683 36.56,0.078 RA1.1
  Layer 1 w0.254: S1.5 9.464,21.752 11.516,21.752 19.72,13.548 19.72,10.754 17.186,8.219 S4.3
  Layer 2 w0.254: S5.3 21.707,4.232 22.031,4.556 26.298,4.556 30.261,8.519 v1(32.725,8.519)
  Layer 4 w0.254: v1(2.524,14.005) 4.074,14.005 8.056,17.987 S1.5
RX: RA1.7 U1.1
TX: RA1.6 U1.5
VUSB: C5.1 C7.2 REG1.1 S2.1 S5.1 | length 91.8
  Top Layer w0.254: C5.1 -0.702,27.192 2.177,30.071 REG1.1 v1(5.242,30.071) ; v1(11.44,-5.197) 12.569,-4.068 C7.2 ; S5.1 19.08,0.64 25.968,7.528 29.174,7.528 31.105,5.598 32.117,5.598 S2.1
  Layer 1 w0.254: v1(0.238,23.378) -4.207,23.378 -6.848,20.736 -6.848,19.898 -6.544,19.593 -5.172,19.593 -4.486,18.907 -4.486,18.145 -3.521,17.18 -3.521,13.675 -2.2,12.354 -2.2,10.322 11.44,-3.318 v1(11.44,-5.197)
  Layer 2 w0.254: v1(11.44,-5.197) 11.44,-2.454 14.767,0.873 16.342,0.873 16.342,0.64 S5.1
  Layer 3 w0.254: v1(0.238,23.378) 3.566,23.378 5.242,25.054 v1(5.242,30.071)
pads on no net: RA1.4 RA1.8 REG1.4 S2. S2.4 S3.2 U1.3 U1.6 U1.8 U1.9 U1.10 U1.11 U1.12 U1.13 U1.14 U1.19 U1.24 U1.25 U1.26 U1.27 U1.28 U2.18 X1.5
copper on no net: | length 25.3
  Top Layer w0.254: 8.775,32.935 v1(8.775,35.483) ; 14.454,28.004 14.454,29.214 15.605,30.365 v1(15.605,30.825) ; 31.02,1.512 31.02,3.7 ; 32.593,-0.956 32.593,2.426 ; v1(48.866,11.677) 48.866,13.447 ; 50.245,12.068 v1(50.245,13.838) ; 50.316,21.331 v1(50.316,23.101) ; 50.705,11.608 50.705,9.131 51.267,8.569 v1(51.267,6.823) ; 51.624,10.689 v1(53.394,10.689) ; 52.154,19.492 v1(52.154,21.262)

## Silkscreen, mask and mechanical layers (free items; w line width, h text height)
Mechanical 1:
  lines w1.2: 0,11.7 0,12 0,11.7 ; 25.04,13.2 25.05,13.2 25.04,13.2
Mechanical 2:
  lines w0.013: 0.006,2.356 0.006,0.006 5.006,0.006